# EAGLE board triple8 (EAGLE 5.06)
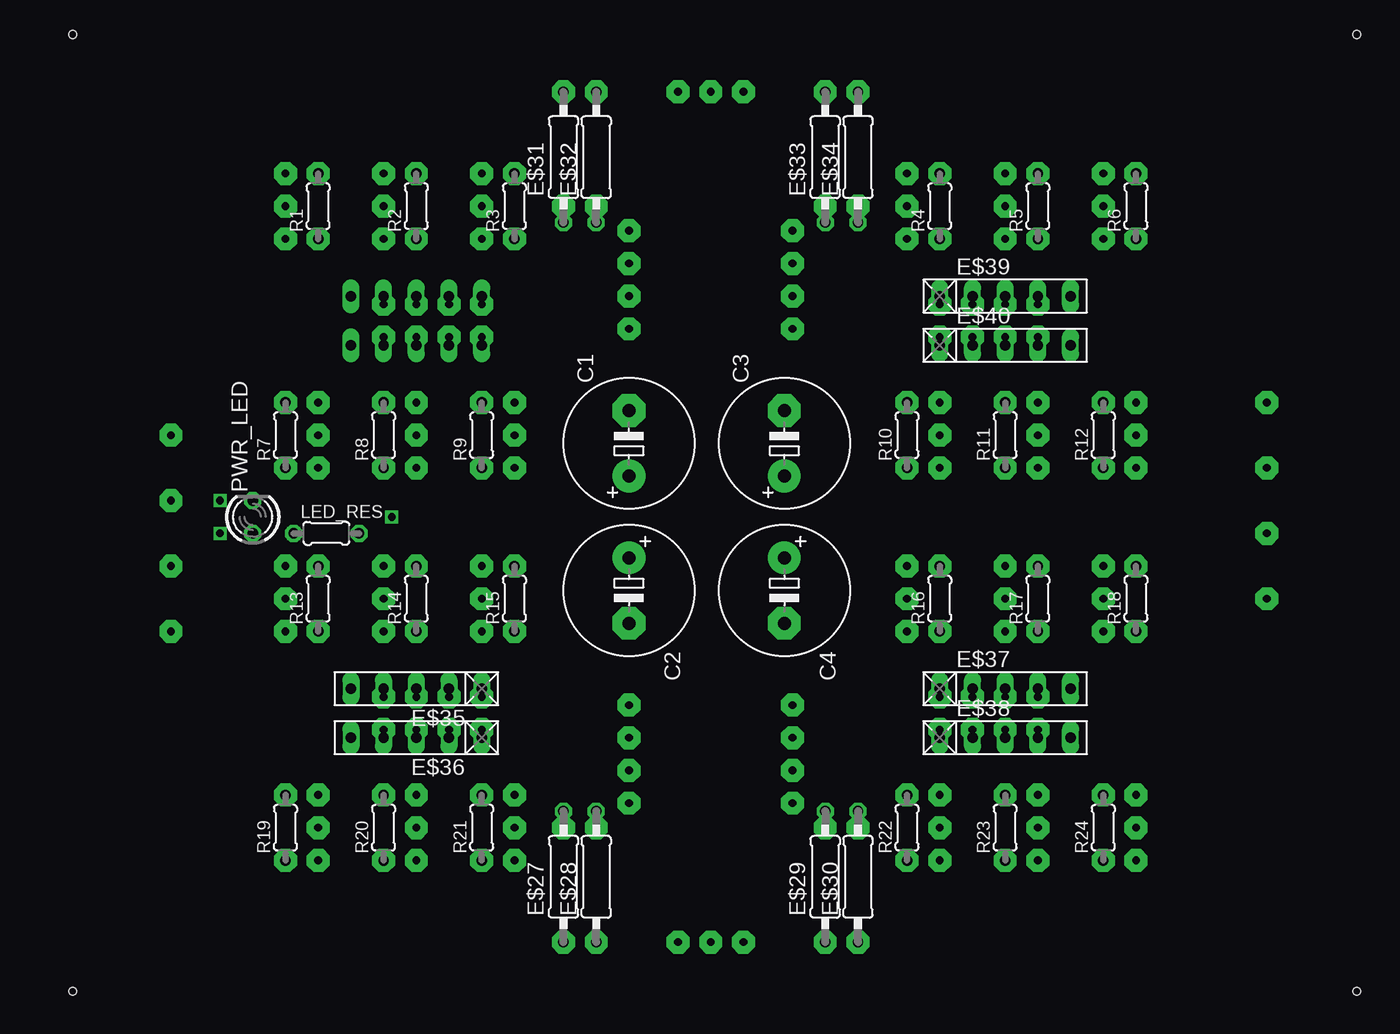
[diagram p0: board, top side]
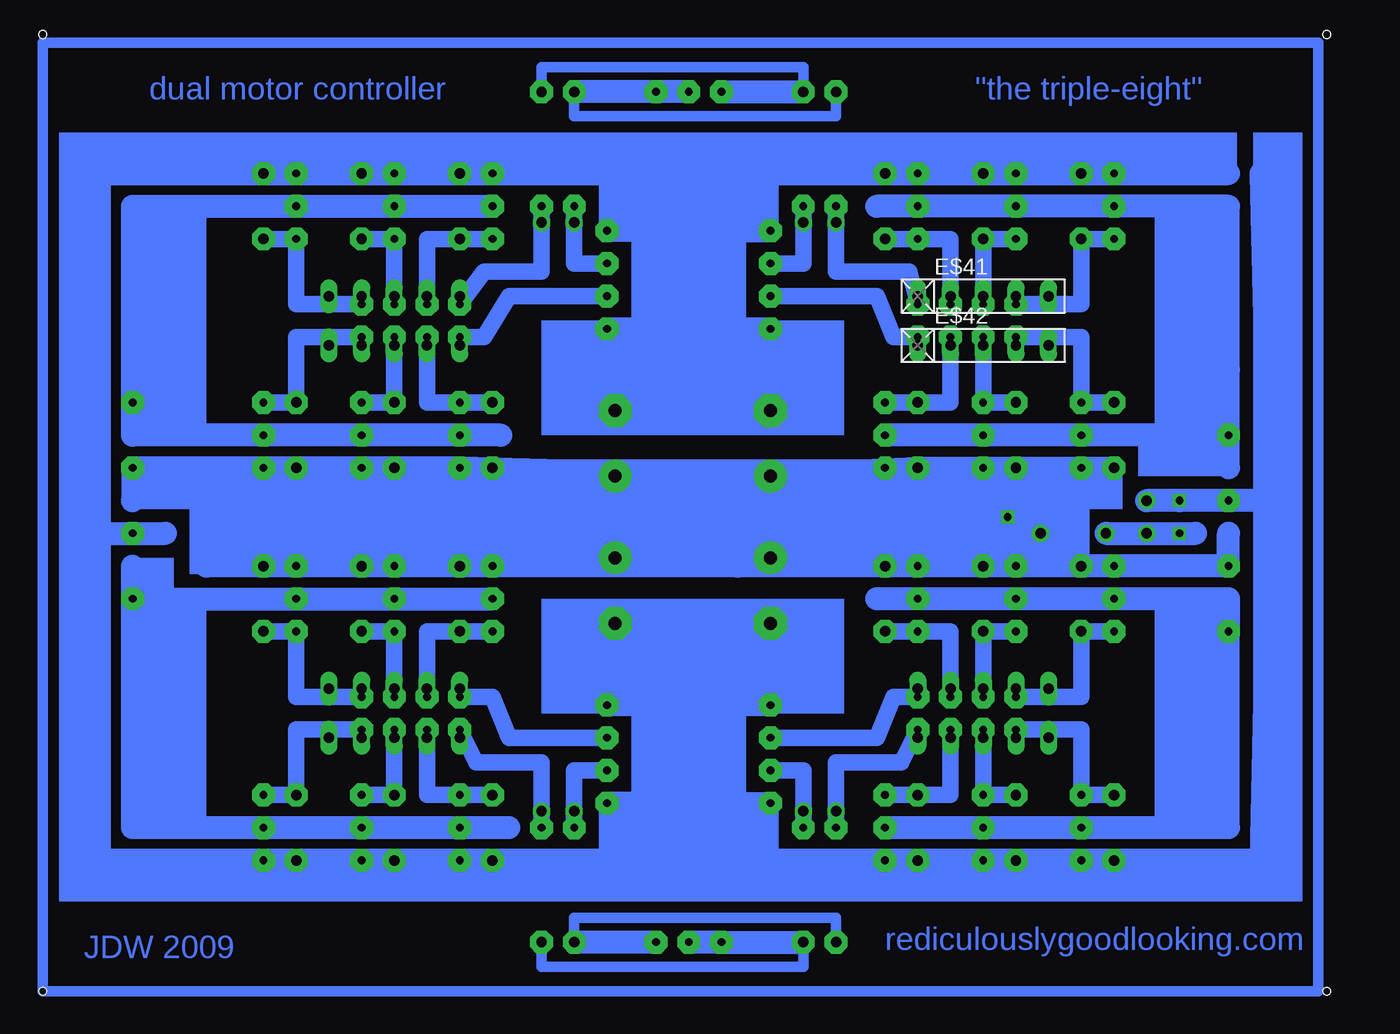
[diagram p1: board, bottom side, seen from below]

No outline drawn. Coordinates in mm, seen from the top.
Copper layers (1*16): Top 0.035mm / dielectric 1.5mm / Bottom 0.035mm
Design rules "default": minimum track width 10mil, minimum drill 24mil, track to track 8mil, track to pad 8mil, pad to pad 8mil, via to via 8mil, smd to smd 8mil, copper to edge 40mil, drill to drill 8mil, minimum pad ring 10mil, minimum via ring 8mil, stop-mask expansion 4mil, vias tented up to drill 0mil, thermal gap 10mil
Holes 0.6 mm at 0,0 0,74.3 99.69,74.3 99.69,0

## Footprints (pad centres in the part's own frame; a part is rotated, then mirrored left to right if it is on the bottom)
E5-10,5 = drill 1.016 pad 2.54 round: + -2.54,0 | drill 1.016 pad 2.54 octagon: - 2.54,0
0207/10 = drill 0.813 octagon: 1 -5.08,0; 2 5.08,0
RN-5 = drill 0.813 long: 1 -5.08,0; 2 -2.54,0; 3 0,0; 4 2.54,0; 5 5.08,0
0204/5 = drill 0.813 octagon: 1 -2.54,0; 2 2.54,0
LED3MM = drill 0.813 octagon: A -1.27,0; K 1.27,0

## Placement (x,y rotation side)
C1  1000mF  [E5-10,5]  43.18,42.55 90 top
C2  1000mF  [E5-10,5]  43.18,31.11 270 top
C3  1000mF  [E5-10,5]  55.24,42.55 90 top
C4  1000mF  [E5-10,5]  55.24,31.11 270 top
E$27  [0207/10]  38.1,8.89 90 top
E$28  [0207/10]  40.64,8.89 90 top
E$29  [0207/10]  58.42,8.89 90 top
E$30  [0207/10]  60.96,8.89 90 top
E$31  [0207/10]  38.1,64.77 90 top
E$32  [0207/10]  40.64,64.77 90 top
E$33  [0207/10]  58.42,64.77 90 top
E$34  [0207/10]  60.96,64.77 90 top
E$35  [RN-5]  26.67,23.5 180 top
E$36  [RN-5]  26.67,19.68 180 top
E$37  [RN-5]  72.39,23.5 0 top
E$38  [RN-5]  72.39,19.68 0 top
E$39  [RN-5]  72.39,53.98 0 top
E$40  [RN-5]  72.39,50.16 0 top
E$41  [RN-5]  26.67,53.98 0 bottom
E$42  [RN-5]  26.67,50.16 0 bottom
LED_RES  [0204/5]  19.68,35.56 0 top
PWR_LED  [LED3MM]  13.97,36.83 90 top
R1  [0204/5]  19.05,60.96 90 top
R2  [0204/5]  26.67,60.96 90 top
R3  [0204/5]  34.29,60.96 90 top
R4  [0204/5]  67.31,60.96 90 top
R5  [0204/5]  74.93,60.96 90 top
R6  [0204/5]  82.55,60.96 90 top
R7  [0204/5]  16.51,43.18 90 top
R8  [0204/5]  24.13,43.18 90 top
R9  [0204/5]  31.75,43.18 90 top
R10  [0204/5]  64.77,43.18 90 top
R11  [0204/5]  72.39,43.18 90 top
R12  [0204/5]  80.01,43.18 90 top
R13  [0204/5]  19.05,30.48 90 top
R14  [0204/5]  26.67,30.48 90 top
R15  [0204/5]  34.29,30.48 90 top
R16  [0204/5]  67.31,30.48 90 top
R17  [0204/5]  74.93,30.48 90 top
R18  [0204/5]  82.55,30.48 90 top
R19  [0204/5]  16.51,12.7 90 top
R20  [0204/5]  24.13,12.7 90 top
R21  [0204/5]  31.75,12.7 90 top
R22  [0204/5]  64.77,12.7 90 top
R23  [0204/5]  72.39,12.7 90 top
R24  [0204/5]  80.01,12.7 90 top

## Library data of the parts
C1-C4 E$27-E$34 LED_RES R1-R24 = rcl
E$35-E$42 = resistor-net
PWR_LED = led

## Nets
S$31: C2.-
S$41: C1.- C3.-

## Tracks (layer width: path | path; a pad name or v marks a point on that pad's centre or on a via)
S$1  (via drill 0.6 pad 1.78)
  Bottom 1.778: v34.29,12.7 v26.67,12.7 v19.05,12.7 7.62,12.7 7.62,30.48 | 7.62,30.48 v16.51,30.48 v24.13,30.48 v31.75,30.48 34.92,30.48 | 7.62,30.48 v7.62,27.94
S$2  (via drill 0.6 pad 1.78)
  Bottom 1.27: v43.18,17.14 40.64,17.14 v40.64,12.7
S$3  (via drill 0.6 pad 1.78)
  Bottom 1.27: v55.88,17.14 58.42,17.14 v58.42,12.7
S$4
  Bottom 0.813: 99.69,73.66 0.64,73.66 0.64,0 99.69,0 99.69,73.66
S$5  (via drill 0.6 pad 1.78)
  other vias: 43.18,40.01
S$6  (via drill 0.6 pad 1.78)
  other vias: 26.67,40.64
S$7  (via drill 0.6 pad 1.78)
  other vias: 55.24,40.01
S$8  (via drill 0.6 pad 1.78)
  Bottom 0.813: v38.1,3.81 38.1,5.71 58.42,5.71 v58.42,3.81
  Bottom 1.778: v52.07,3.81 v58.42,3.81
S$9  (via drill 0.6 pad 1.78)
  other vias: 43.18,33.66
S$10  (via drill 0.6 pad 1.78)
  Bottom 0.406: v64.77,10.16 45.72,10.16 v34.29,10.16
  Bottom 1.778: 45.72,14.61 v55.88,14.61 | 45.72,14.61 v43.18,14.61 | 45.72,10.16 45.72,14.61
S$11  (via drill 0.6 pad 1.78)
  other vias: 72.39,33.02
S$12  (via drill 0.6)
  other vias: 11.43,35.56
S$13  (via drill 0.6 pad 1.78)
  Bottom 1.778: v34.29,43.18 v26.67,43.18 v19.05,43.18 7.62,43.18 | 7.62,48.26 7.62,60.96 v16.51,60.96 v24.13,60.96 v31.75,60.96 34.92,60.96 | 7.62,40.64 7.62,43.18 | 7.62,48.26 8.26,48.26 | 7.62,43.18 7.62,48.26
S$14  (via drill 0.6 pad 1.78)
  other vias: 72.39,10.16
S$15  (via drill 0.6 pad 1.78)
  other vias: 26.67,10.16
S$16  (via drill 0.6 pad 1.78)
  Bottom 1.27: v24.13,50.8 19.05,50.8 v19.05,45.72 v16.51,45.72
S$17  (via drill 0.6 pad 1.78)
  other vias: 26.67,33.02
S$18  (via drill 0.6 pad 1.78)
  Bottom 1.27: v69.85,20.32 69.85,15.24 v67.31,15.24 v64.77,15.24
S$19  (via drill 0.6 pad 1.78)
  Bottom 1.27: v67.31,20.32 66.04,17.78 60.96,17.78 v60.96,12.7
S$20  (via drill 0.6 pad 1.78)
  Bottom 1.27: v69.85,53.34 69.85,58.42 v67.31,58.42 v64.77,58.42
S$21  (via drill 0.6 pad 1.78)
  Bottom 1.27: v26.67,50.8 v26.67,45.72 v24.13,45.72
S$22  (via drill 0.6 pad 1.78)
  other vias: 26.67,63.5
S$23  (via drill 0.6 pad 1.78)
  Bottom 1.27: v67.31,22.86 64.77,22.86 63.5,19.68 v55.88,19.68
S$24  (via drill 0.6 pad 1.78)
  other vias: 72.39,63.5
S$25  (via drill 0.6 pad 1.78)
  Bottom 1.27: v60.96,60.96 60.96,55.88 65.41,55.88 v67.31,53.34
S$26  (via drill 0.6 pad 1.78)
  Bottom 1.27: v64.77,27.94 v67.31,27.94 69.85,27.94 v69.85,22.86
S$27  (via drill 0.6 pad 1.78)
  Bottom 1.27: v26.67,53.34 v26.67,58.42 v24.13,58.42
S$28  (via drill 0.6 pad 1.78)
  Bottom 1.27: v29.21,22.86 29.21,27.94 v31.75,27.94 v34.29,27.94
S$29  (via drill 0.6 pad 1.78)
  Bottom 1.27: v43.18,19.68 34.92,19.68 33.66,22.86 v31.75,22.86
S$30  (via drill 0.6 pad 1.78)
  Bottom 1.27: v29.21,20.32 29.21,15.24 v31.75,15.24 v34.29,15.24
S$31  (via drill 0.6 pad 1.78)
  Bottom 1.778: v43.18,22.23 v55.88,22.23 | 56.52,27.94 55.88,27.94 | v55.88,22.23 55.88,27.94 | 55.88,27.94 C2.- v43.18,22.23 | v43.18,22.23 v55.88,22.23
S$32  (via drill 0.6 pad 1.78)
  Bottom 1.27: v38.1,12.7 38.1,17.78 33.02,17.78 v31.75,20.32
S$33  (via drill 0.6 pad 1.78)
  Bottom 1.27: v72.39,20.32 v72.39,15.24 v74.93,15.24
S$34  (via drill 0.6 pad 1.78)
  Bottom 1.27: v69.85,50.8 69.85,45.72 v67.31,45.72 v64.77,45.72
S$35  (via drill 0.6 pad 1.78)
  Bottom 0.406: v34.29,63.5 46.35,63.5 v64.77,63.5
  Bottom 1.778: 46.99,59.05 v43.18,59.05 | 46.99,59.05 v55.88,59.05 | 46.35,63.5 46.99,59.05
S$36  (via drill 0.6 pad 1.78)
  Bottom 1.27: v72.39,53.34 v72.39,58.42 v74.93,58.42
S$37  (via drill 0.6 pad 1.78)
  Bottom 1.27: v74.93,53.34 80.01,53.34 v80.01,58.42 v82.55,58.42
S$38  (via drill 0.6 pad 1.78)
  Bottom 1.27: v55.88,56.52 58.42,56.52 v58.42,60.96
S$39  (via drill 0.6 pad 1.78)
  Bottom 1.27: v31.75,50.8 33.66,50.8 34.92,53.98 v43.18,53.98
S$40  (via drill 0.6 pad 1.78)
  Bottom 1.27: v43.18,56.52 40.64,56.52 v40.64,60.96
S$41  (via drill 0.6 pad 1.78)
  Bottom 0.813: v43.18,51.44 v55.88,51.44
  Bottom 1.778: C1.- C3.- v55.88,51.44 v43.18,51.44 C1.-
  other vias: 43.18,45.09 55.24,45.09
S$42  (via drill 0.6 pad 1.78)
  other vias: 43.18,28.57
S$43  (via drill 0.6 pad 1.78)
  other vias: 55.24,33.66
S$44  (via drill 0.6 pad 1.78)
  Bottom 0.813: v60.96,69.85 60.96,71.75 40.64,71.75 v40.64,69.85
  Bottom 1.778: v46.99,69.85 v40.64,69.85
S$45  (via drill 0.6 pad 1.78)
  Bottom 1.27: v26.67,20.32 v26.67,15.24 v24.13,15.24
S$46  (via drill 0.6 pad 1.78)
  Bottom 1.27: v24.13,20.32 19.05,20.32 v19.05,15.24 v16.51,15.24
S$47  (via drill 0.6 pad 1.78)
  Bottom 1.27: v26.67,22.86 v26.67,27.94 v24.13,27.94
S$48  (via drill 0.6 pad 1.78)
  Bottom 1.27: v24.13,22.86 19.05,22.86 v19.05,27.94 v16.51,27.94
S$49  (via drill 0.6)
  other vias: 24.77,36.83
S$50  (via drill 0.6 pad 1.78)
  Bottom 1.27: v29.21,53.34 29.21,58.42 v31.75,58.42 v34.29,58.42
S$51  (via drill 0.6 pad 1.78)
  Bottom 1.27: v74.93,20.32 80.01,20.32 v80.01,15.24 v82.55,15.24
S$52  (via drill 0.6 pad 1.78)
  Bottom 1.27: v74.93,22.86 80.01,22.86 v80.01,27.94 v82.55,27.94
S$53  (via drill 0.6 pad 1.78)
  Bottom 1.27: v72.39,22.86 v72.39,27.94 v74.93,27.94
S$54  (via drill 0.6)
  Bottom 1.778: v17.14,35.56 10.16,35.56
S$55  (via drill 0.6 pad 1.78)
  other vias: 7.62,33.02
S$56  (via drill 0.6 pad 1.78)
  other vias: 55.24,28.57
S$57  (via drill 0.6 pad 1.78)
  other vias: 72.39,40.64
S$58  (via drill 0.6 pad 1.78)
  Bottom 1.27: v31.75,53.34 32.38,55.88 38.1,55.88 v38.1,60.96
S$60  (via drill 0.6 pad 1.78)
  Bottom 1.27: v34.29,45.72 v31.75,45.72 29.21,45.72 v29.21,50.8
S$61  (via drill 0.6 pad 1.78)
  Bottom 1.27: v72.39,50.8 v72.39,45.72 v74.93,45.72
S$62  (via drill 0.6 pad 1.78)
  Bottom 1.27: v74.93,50.8 80.01,50.8 v80.01,45.72 v82.55,45.72
S$64  (via drill 0.6 pad 1.78)
  Bottom 0.406: v19.05,40.64 v24.13,40.64 v31.75,40.64 v34.29,40.64 45.72,40.01 v64.77,40.64 | v80.01,33.02 v74.93,33.02 v67.31,33.02 v64.77,33.02 45.72,33.02 v34.29,33.02
  Bottom 1.778: 92.71,38.1 v92.71,40.64 v82.55,40.64 v80.01,40.64 v74.93,40.64 v67.31,40.64 45.72,40.01 | v16.51,40.64 v19.05,40.64 v24.13,40.64 v31.75,40.64 45.72,40.01 | 45.72,33.02 v67.31,33.02 v74.93,33.02 v80.01,33.02 v82.55,33.02 87,33.02 | 45.72,33.02 45.72,40.01 | 45.72,33.02 v31.75,33.02 v24.13,33.02 v19.05,33.02 v16.51,33.02 7.62,33.02 7.62,35.56
S$65  (via drill 0.6 pad 1.78)
  Bottom 1.27: v55.88,53.98 63.5,53.98 65.41,50.8 v67.31,50.8
S$67  (via drill 0.6 pad 1.78)
  Bottom 1.27: v24.13,53.34 19.05,53.34 v19.05,58.42 v16.51,58.42
S$70  (via drill 0.6 pad 1.78)
  Bottom 1.778: v92.71,30.48 92.71,33.02 | v64.77,30.48 v72.39,30.48 v80.01,30.48 v92.71,30.48 | v92.71,30.48 92.71,12.7 v82.55,12.7 v74.93,12.7 v67.31,12.7 63.5,12.7
S$72  (via drill 0.6 pad 1.78)
  Bottom 1.778: 92.71,43.18 v92.71,45.72 | v64.77,60.96 v72.39,60.96 v80.01,60.96 92.71,60.96 92.71,43.18 | 92.71,43.18 v82.55,43.18 v74.93,43.18 v67.31,43.18 64.14,43.18
S$73  (via drill 0.6 pad 1.78)
  Bottom 0.813: v40.64,3.81 40.64,1.91 60.96,1.91 v60.96,3.81
  Bottom 1.778: v49.53,3.81 v46.99,3.81 v40.64,3.81
S$74  (via drill 0.6 pad 1.78)
  Bottom 0.813: v38.1,69.85 38.1,67.94 58.42,67.94 v58.42,69.85
  Bottom 1.778: v49.53,69.85 v52.07,69.85 v58.42,69.85
S$75  (via drill 0.6 pad 1.78)
  other vias: 7.62,43.18
S$79  (via drill 0.6, 0.6 pad 1.78)
  Bottom 1.778: 95.25,35.56 95.25,63.5 v82.55,63.5 v80.01,63.5 v74.93,63.5 v67.31,63.5 v31.75,63.5 v24.13,63.5 v19.05,63.5 v16.51,63.5 7.62,63.5 | 95.25,35.56 95.25,10.16 v82.55,10.16 v80.01,10.16 v74.93,10.16 v67.31,10.16 v31.75,10.16 v24.13,10.16 v19.05,10.16 v16.51,10.16 5.08,10.16 4.45,38.1 | 4.45,38.1 5.08,63.5 | 4.45,38.1 v7.62,38.1 v11.43,38.1 v13.97,38.1 | 95.25,35.56 v92.71,35.56 90.17,35.56
(copper drawn outside any net)
  shapes: Bottom area x49

## Text on the board
Bottom: "the triple-eight" | dual motor controller | rediculouslygoodlooking.com | JDW 2009